# Altium PCB Switch.PcbDoc (part 2 of 2)
Units mm, origin at the board's own origin, x right, y up, seen from the top; angles counter-clockwise.
Board outline 170 x 46 mm, 4 copper layers (SIG, GND1, GND2, PWR/SIG), stack 1.564 mm thick; 45 components, 96 nets, 349 pads, 136 vias.
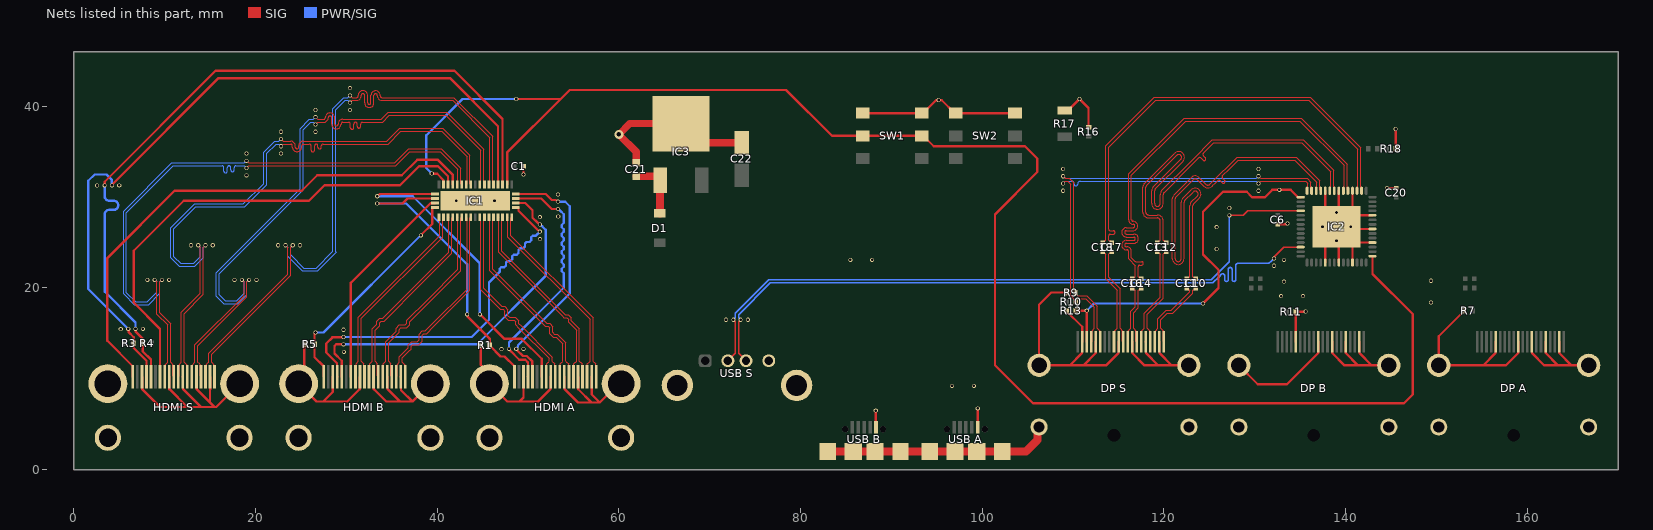
[diagram p4: the nets of this part, all layers, seen from the top]

## Via types
v1: diameter 0.45, hole 0.3, SIG to PWR/SIG, 134 vias
v2: diameter 1, hole 0.5, SIG to PWR/SIG, 2 vias

## Nets (pads, with @x,y where several pads share a name; then routed paths per layer and width w, separated by ;. In a path a pad name is that pad's centre, name@x,y a point inside that pad or via, vN(x,y) a via of type N, cw(c..) or ccw(c..) an arc to the next point about the centre after c; other vN are vias at no path point) (continued)
DP_Sink_AUX_N: "DP S.17" IC2.14 R10.1 | length 49.6
  SIG w0.122: v1(108.9,31.5) 109.138,31.738 109.426,31.738 109.736,31.428 109.736,19.191 110.086,18.841 110.086,18.689 R10.1@110.275,18.5 110.464,18.689 110.464,18.766 110.535,18.838 111.362,18.838 112.338,17.862 112.338,15.556 112.079,15.297 112.079,14.159 112,14.08 ; v1(130.4,31.5) 130.638,31.738 135.611,31.738 135.838,31.511 135.838,30.788 IC2.14@135.75,30.7
  PWR/SIG w0.122: v1(108.9,31.5) 109.138,31.738 109.862,31.738 cw(c109.862,31.5) 110.1,31.5 110.1,31.438 ccw(c110.3,31.438) 110.5,31.438 cw(c110.8,31.438) 110.8,31.738 130.162,31.738 v1(130.4,31.5)
DP_Sink_AUX_P: "DP S.15" IC2.13 R9.1 | length 49.4
  SIG w0.122: v1(108.9,32.3) 109.138,32.062 109.56,32.062 110.061,31.562 110.061,19.81 110.086,19.785 110.086,19.689 R9.1@110.275,19.5 110.464,19.311 110.464,19.234 110.535,19.162 111.497,19.162 112.662,17.997 112.662,15.556 112.921,15.297 112.921,14.159 113,14.08 ; v1(130.4,32.3) 130.638,32.062 135.745,32.062 136.162,31.645 136.162,30.788 IC2.13@136.25,30.7
  PWR/SIG w0.122: v1(108.9,32.3) 109.138,32.062 130.162,32.062 v1(130.4,32.3)
DP_Sink_D0_AC_N: "DP S.10" C17.2 | length 10.8
  SIG w0.122: C17.2@114.25,24 114.061,23.811 113.984,23.811 113.913,23.74 113.913,21.157 115.162,19.907 115.162,15.556 115.421,15.297 115.421,14.159 115.5,14.08
DP_Sink_D0_AC_P: "DP S.12" C18.2 | length 10.8
  SIG w0.122: C18.2@113.25,24 113.439,23.811 113.516,23.811 113.588,23.739 113.588,21.307 113.58,21.299 113.58,21.03 114.838,19.772 114.838,15.556 114.579,15.297 114.579,14.159 114.5,14.08
DP_Sink_D0_N: C17.1 IC2.3 | length 48.2
  SIG w0.122: C17.1@114.25,25 114.061,25.189 113.984,25.189 113.913,25.26 113.913,25.3 113.913,25.737 cw(c114.1,25.737) 114.1,25.924 114.425,25.924 ccw(c114.425,26.112) 114.612,26.112 ccw(c114.425,26.112) 114.425,26.3 114.1,26.3 cw(c114.1,26.488) 113.913,26.488 113.913,27.6 113.913,35.513 119.075,40.675 135.94,40.675 141.338,35.278 141.338,30.788 IC2.3@141.25,30.7
DP_Sink_D0_P: C18.1 IC2.2 | length 48.2
  SIG w0.122: C18.1@113.25,25 113.439,25.189 113.516,25.189 113.588,25.26 113.588,35.647 118.941,41 136.075,41 141.662,35.413 141.662,30.788 IC2.2@141.75,30.7
DP_Sink_D1_AC_N: "DP S.7" C14.2 | length 6.5
  SIG w0.122: 117,14.08 116.921,14.159 116.921,15.297 116.662,15.556 116.662,17.3 117.162,17.8 117.162,19.74 117.234,19.811 117.311,19.811 C14.2@117.5,20
DP_Sink_D1_AC_P: "DP S.9" C16.2 | length 6.5
  SIG w0.122: 116,14.08 116.079,14.159 116.079,15.297 116.338,15.556 116.338,17.435 116.838,17.935 116.838,19.74 116.766,19.811 116.689,19.811 C16.2@116.5,20
DP_Sink_D1_N: C14.1 IC2.6 | length 48.2
  SIG w0.122: C14.1@117.5,21 117.311,21.189 117.234,21.189 117.162,21.26 117.162,21.9 117.162,22.337 cw(c117.35,22.337) 117.35,22.524 117.549,22.524 ccw(c117.549,22.712) 117.737,22.712 ccw(c117.549,22.712) 117.549,22.9 116.937,22.9 cw(c116.937,23.088) 116.804,22.955 116.425,23.335 116.425,23.8 116.425,24.023 ccw(c115.912,24.023) 115.912,24.536 115.851,24.536 cw(c115.851,24.724) 115.663,24.724 cw(c115.851,24.724) 115.851,24.912 116.674,24.912 ccw(c116.674,25.425) 117.187,25.425 ccw(c116.674,25.425) 116.674,25.937 115.855,25.937 cw(c115.855,26.125) 115.667,26.125 cw(c115.855,26.125) 115.855,26.313 116.613,26.313 ccw(c116.613,26.826) 117.126,26.826 ccw(c116.613,26.826) 116.613,27.338 cw(c116.613,27.526) 116.425,27.526 116.425,31 116.425,32.425 122.375,38.375 134.965,38.375 139.838,33.503 139.838,30.788 IC2.6@139.75,30.7
DP_Sink_D1_P: C16.1 IC2.5 | length 48.2
  SIG w0.122: C16.1@116.5,21 116.689,21.189 116.766,21.189 116.838,21.26 116.838,22.462 116.1,23.2 116.1,23.8 116.1,24.023 ccw(c115.912,24.023) 115.912,24.211 115.851,24.211 cw(c115.851,24.724) 115.338,24.724 cw(c115.851,24.724) 115.851,25.237 116.674,25.237 ccw(c116.674,25.425) 116.862,25.425 ccw(c116.674,25.425) 116.674,25.612 115.855,25.612 cw(c115.855,26.125) 115.342,26.125 cw(c115.855,26.125) 115.855,26.638 116.613,26.638 ccw(c116.613,26.826) 116.801,26.826 ccw(c116.613,26.826) 116.613,27.014 cw(c116.613,27.526) 116.1,27.526 116.1,31 116.1,32.559 122.241,38.7 135.1,38.7 140.162,33.638 140.162,30.788 IC2.5@140.25,30.7
DP_Sink_D2_AC_N: "DP S.4" C12.2 | length 11
  SIG w0.122: 118.5,14.08 118.421,14.159 118.421,15.297 118.162,15.556 118.162,17.103 119.912,18.853 119.912,23.74 119.984,23.811 120.061,23.811 C12.2@120.25,24
DP_Sink_D2_AC_P: "DP S.6" C13.2 | length 11
  SIG w0.122: 117.5,14.08 117.579,14.159 117.579,15.297 117.838,15.556 117.838,17.238 119.588,18.988 119.588,23.74 119.516,23.811 119.439,23.811 C13.2@119.25,24
DP_Sink_D2_N: C12.1 IC2.9 | length 48.2
  SIG w0.122: C12.1@120.25,25 120.061,25.189 119.984,25.189 119.912,25.26 119.912,27.171 119.912,27.394 ccw(c119.273,27.394) 119.273,28.034 118.318,28.034 cw(c118.318,28.349) 118.003,28.349 118.003,31.073 cw(c118.318,31.073) 118.095,31.295 121.401,34.601 cw(c121.624,34.379) 121.846,34.156 118.82,31.129 ccw(c119.273,30.677) 118.633,30.677 118.633,29.303 ccw(c119.273,29.303) 119.273,28.663 ccw(c119.273,29.303) 119.912,29.303 119.912,30.282 cw(c120.227,30.282) 120.004,30.504 123.34,33.84 123.45,33.95 123.5,34 123.809,34.309 cw(c123.942,34.176) 124.074,34.309 124.301,34.082 ccw(c124.434,34.215) 124.567,34.082 ccw(c124.434,34.215) 124.567,34.348 124.34,34.574 cw(c124.473,34.707) 124.34,34.84 125.1,35.6 125.475,35.975 135.175,35.975 138.338,32.812 138.338,30.788 IC2.9@138.25,30.7
DP_Sink_D2_P: C13.1 IC2.8 | length 48.2
  SIG w0.122: C13.1@119.25,25 119.439,25.189 119.516,25.189 119.588,25.26 119.588,27.171 119.588,27.394 ccw(c119.273,27.394) 119.273,27.709 118.318,27.709 cw(c118.318,28.349) 117.678,28.349 117.678,31.073 cw(c118.318,31.073) 117.865,31.524 121.171,34.831 cw(c121.624,34.379) 122.124,33.979 122.124,33.974 119.05,30.9 ccw(c119.273,30.677) 118.958,30.677 118.958,29.303 ccw(c119.273,29.303) 119.273,28.988 ccw(c119.273,29.303) 119.588,29.303 119.588,30.282 cw(c120.227,30.282) 119.774,30.734 122.82,33.779 123.22,34.18 125.341,36.3 135.309,36.3 138.662,32.947 138.662,30.788 IC2.8@138.75,30.7
DP_Sink_D3_AC_N: "DP S.1" C10.2 | length 8
  SIG w0.122: 120,14.08 119.921,14.159 119.921,15.297 119.662,15.556 119.662,16.5 120.387,17.225 120.943,17.225 123.162,19.445 123.162,19.74 123.234,19.811 123.311,19.811 C10.2@123.5,20
DP_Sink_D3_AC_P: "DP S.3" C11.2 | length 8
  SIG w0.122: 119,14.08 119.079,14.159 119.079,15.297 119.338,15.556 119.338,16.635 120.253,17.55 120.808,17.55 122.838,19.579 122.838,19.74 122.766,19.811 122.689,19.811 C11.2@122.5,20
DP_Sink_D3_N: C10.1 IC2.12 | length 48.2
  SIG w0.122: C10.1@123.5,21 123.311,21.189 123.234,21.189 123.162,21.26 123.162,21.771 123.162,29.027 cw(c123.477,29.027) 123.254,29.249 123.894,29.889 ; 123.895,29.89 ccw(c123.442,30.342) 123.895,30.794 ccw(c123.442,30.342) 122.99,30.794 122.07,29.874 ccw(c122.523,29.423) 121.883,29.423 121.883,23.22 cw(c121.568,23.22) 121.568,22.905 cw(c121.568,23.22) 121.253,23.22 121.253,29.818 cw(c121.568,29.818) 121.345,30.04 123.22,31.915 cw(c123.442,31.692) 123.665,31.915 124.387,31.192 ccw(c124.84,31.644) 125.292,31.192 125.45,31.35 125.6,31.5 125.909,31.809 cw(c126.042,31.676) 126.174,31.809 126.401,31.582 ccw(c126.534,31.715) 126.667,31.582 ccw(c126.534,31.715) 126.667,31.848 126.44,32.074 cw(c126.573,32.207) 126.44,32.34 127.25,33.15 128.175,34.075 134.418,34.075 136.838,31.655 136.838,30.788 IC2.12@136.75,30.7
DP_Sink_D3_P: C11.1 IC2.11 | length 48.3
  SIG w0.122: C11.1@122.5,21 122.689,21.189 122.766,21.189 122.838,21.26 122.838,21.771 122.838,29.027 cw(c123.477,29.027) 123.024,29.479 123.666,30.12 ccw(c123.442,30.342) 123.665,30.565 ccw(c123.442,30.342) 123.22,30.565 122.3,29.645 ccw(c122.523,29.423) 122.208,29.423 122.208,23.22 cw(c121.568,23.22) 121.568,22.581 cw(c121.568,23.22) 120.928,23.22 120.928,29.818 cw(c121.568,29.818) 121.115,30.27 122.991,32.145 cw(c123.442,31.692) 123.895,32.144 124.617,31.422 ccw(c124.84,31.644) 125.063,31.422 125.22,31.58 128.041,34.4 134.552,34.4 137.162,31.79 137.162,30.788 IC2.11@137.25,30.7 IC2.11@137.31,30.64
DP_Sink_HPD: "DP S.18" IC2.15 R13.2 | length 41.9
  SIG w0.254: R13.2@110.275,17.5 110.275,17.45 110.325,17.5 v1(111.5,17.5) 111.5,14.08 ; v1(124.3,18.3) 126,20 126,22 124.3,23.7 124.3,28.4 126.5,30.6 129.1,30.6 129.7,30 131.123,30 131.923,30.8 v1(132.7,30.8) 133.95,30.8 134.75,30 IC2.15@135.05,30
  PWR/SIG w0.254: v1(111.5,17.5) 112.3,18.3 v1(124.3,18.3)
ENABLE: IC1.2 IC1.16 IC2.43 SW1.2 SW1.5 | length 180.7
  SIG w0.254: v1(39.4,32.6) 39.438,32.562 40.004,32.562 40.677,31.89 40.677,31.423 IC1.16@40.7,31.4 ; IC1.2@47.7,31.4 47.7,34.9 53.6,40.8 ; v1(48.7,40.8) 53.6,40.8 ; IC2.43@142.95,23.5 142.95,21.55 147.4,17.1 147.4,8.3 146.4,7.3 105.6,7.3 101.4,11.5 101.4,28.1 106.058,32.758 106.058,34.242 104.7,35.6 94.65,35.6 93.5,36.75 SW1.5@93.35,36.75 SW1.2@86.85,36.75 83.45,36.75 78.4,41.8 54.6,41.8 53.6,40.8
  PWR/SIG w0.254: v1(39.4,32.6) 38.8,33.2 38.8,36.8 42.8,40.8 v1(48.7,40.8)
GND: "DP A.2" "DP A.5" "DP A.8" "DP A.11" "DP A.16" "DP A.MH1" "DP A.MH2" "DP A.MH3" "DP A.MH4" "DP B.2" "DP B.5" "DP B.8" "DP B.11" "DP B.16" "DP B.MH1" "DP B.MH2" "DP B.MH3" "DP B.MH4" "DP S.2" "DP S.5" "DP S.8" "DP S.11" "DP S.16" "DP S.19" "DP S.MH1" "DP S.MH2" "DP S.MH3" "DP S.MH4" "HDMI A.2" "HDMI A.5" "HDMI A.8" "HDMI A.11" "HDMI A.17" "HDMI A.MH1" "HDMI A.MH2" "HDMI A.MH3" "HDMI A.MH4" "HDMI B.2" "HDMI B.5" "HDMI B.8" "HDMI B.11" "HDMI B.17" "HDMI B.MH1" "HDMI B.MH2" "HDMI B.MH3" "HDMI B.MH4" "HDMI S.2" "HDMI S.5" "HDMI S.8" "HDMI S.11" "HDMI S.17" "HDMI S.MH1" "HDMI S.MH2" "HDMI S.MH3" "HDMI S.MH4" "USB A.5" "USB A.Shell" "USB B.5" "USB B.Shell" "USB S.4" "USB S.Shell" C1.2 C6.2 C20.1 C21.2 C22.2 IC1.43 IC2.4 IC2.7 IC2.10 IC2.33 IC2.36 IC2.39 IC2.46 IC2.49 IC2.52 IC2.57 IC3.3 R1.1 R5.1 R7.1 R9.2 R11.1 R13.1 R16.1 R17.1 R18.1 SW1.3 SW1.6 SW2.3 SW2.6 | length 319.1
  SIG w0.254: 7.5,10.235 7.523,10.212 7.523,8.87 9.493,6.9 12.493,6.9 ; 10.5,10.235 10.523,10.212 10.523,8.87 12.493,6.9 ; 12,10.235 12.023,10.212 12.023,8.87 13.993,6.9 ; 13.5,10.235 13.523,10.212 13.523,8.87 15,7.393 ; 15.023,8.87 15.023,10.212 15,10.235 15,7.393 ; 18.25,9.475 15.675,6.9 15.493,6.9 ; R5.1@25.5,13.8 25.377,13.677 25.377,10.102 24.75,9.475 26.725,7.5 27.451,7.5 ; 28.5,10.235 28.5,8.549 27.451,7.5 ; 31.5,10.235 31.477,10.212 31.477,8.87 30.107,7.5 27.451,7.5 ; 33,10.235 33.023,10.212 33.023,8.87 34.393,7.5 35.893,7.5 ; 34.5,10.235 34.523,10.212 34.523,8.87 35.893,7.5 ; 36,10.235 36.023,10.212 36.023,8.752 37.275,7.5 ; 39.25,9.475 37.275,7.5 ; R1.1@44.8,13.7 44.8,11.513 45.75,10.563 45.75,9.475 47.725,7.5 49.051,7.5 ; 49.5,10.235 49.5,7.949 49.051,7.5 ; v1(49.5,32.5) C1.2@49.5,33.4 ; 52.5,10.235 52.477,10.212 52.477,8.87 51.107,7.5 49.051,7.5 ; 54,10.235 54.023,10.212 54.023,8.87 55.488,7.405 56.976,7.405 ; 55.5,10.235 55.523,10.212 55.523,8.859 56.976,7.405 ; 57,10.235 57,8.31 57.905,7.405 ; 60.25,9.475 59.975,9.475 57.905,7.405 ; SW1.3@86.85,39.25 SW1.6@93.35,39.25 93.5,39.25 94.912,40.662 95.162,40.662 v1(95.2,40.7) 95.238,40.662 95.538,40.662 96.95,39.25 SW2.3@97.1,39.25 SW2.6@103.6,39.25 ; v1@88.25,6.5 88.275,6.475 88.275,4.7 88.3,4.675 ; 99.5,4.675 v1(99.5,6.75) ; R17.1@109.1,39.55 109.45,39.55 v1(110.7,40.8) 111.7,39.8 R16.1@111.7,37.7 ; R13.1@109.275,17.5 109.275,17.45 111,15.725 111,14.08 110.987,14.067 110.987,12.835 109.632,11.48 ; R9.2@109.275,19.5 107.6,19.5 106.25,18.15 106.25,11.48 109.632,11.48 ; 112.5,14.08 112.487,14.067 112.487,12.835 111.132,11.48 ; 115,14.08 114.987,14.067 114.987,12.835 113.632,11.48 111.132,11.48 ; 116.5,14.08 116.513,14.067 116.513,12.835 117.868,11.48 119.368,11.48 ; 118,14.08 118.013,14.067 118.013,12.835 119.368,11.48 ; 119.5,14.08 119.513,14.067 119.513,12.835 120.868,11.48 ; 122.75,11.48 120.868,11.48 ; 128.25,11.48 130.33,9.4 133.552,9.4 136.987,12.835 136.987,14.067 137,14.08 ; C6.2@132.5,27 133.447,27 133.547,27.1 v1(133.6,27.1) ; 134.5,14.08 R11.1@134.5,17.4 v1(135.6,17.4) ; IC2.33@137.75,22.8 137.75,25.5 IC2.57@139,26.75 ; IC2.10@137.75,30.7 137.75,28 IC2.57@139,26.75 ; 138.5,14.08 138.513,14.067 138.513,12.835 139.868,11.48 141.368,11.48 ; IC2.36@139.25,22.8 IC2.57@139.25,26.5 ; IC2.7@139.25,30.7 IC2.57@139.25,27 ; 140,14.08 140.013,14.067 140.013,12.835 141.368,11.48 ; IC2.39@140.75,22.8 IC2.57@140.75,25 ; IC2.4@140.75,30.7 140.75,28.5 IC2.57@140.25,28 ; 141.5,14.08 141.513,14.067 141.513,12.835 142.868,11.48 ; IC2.46@142.95,25 IC2.57@140.75,25 ; IC2.49@142.95,26.5 IC2.57@139.25,26.5 ; IC2.52@142.95,28 IC2.57@140.25,28 ; v1(144.55,31) C20.1@145.55,31 ; 144.75,11.48 142.868,11.48 ; R18.1@145.5,35.35 v1(145.5,37.5) ; R7.1@153,17.5 153,17.45 150.25,14.7 150.25,11.48 155.132,11.48 ; 156.5,14.08 156.487,14.067 156.487,12.835 155.132,11.48 ; 159,14.08 158.987,14.067 158.987,12.835 157.632,11.48 155.132,11.48 ; 160.5,14.08 160.513,14.067 160.513,12.835 161.868,11.48 163.368,11.48 ; 162,14.08 162.013,14.067 162.013,12.835 163.368,11.48 ; 163.5,14.08 163.513,14.067 163.513,12.835 164.868,11.48 ; 166.75,11.48 164.868,11.48 ; 12.493,6.9 13.993,6.9 ; 13.993,6.9 15.493,6.9 ; 15,7.393 15.493,6.9 ; 35.893,7.5 37.275,7.5 ; 56.976,7.405 57.905,7.405 ; 109.632,11.48 111.132,11.48 ; 119.368,11.48 120.868,11.48 ; IC2.57@139,26.75 IC2.57@139.25,27 ; IC2.57@139,26.75 IC2.57@139.25,26.5 ; IC2.57@139.25,26.5 IC2.57@140.75,25 ; IC2.57@139.25,27 IC2.57@140.25,28 ; 141.368,11.48 142.868,11.48 ; 163.368,11.48 164.868,11.48
  SIG w0.8: C21.2@61.9,33.8 61.9,35 v2(60,36.9) 60.004,36.9 61.204,38.1 IC3.3@66.85,38.1 68.95,36 C22.2@73.5,36
  SIG w0.9: 83,2 85.8,2 88.2,2 91,2 94.2,2 97,2 99.4,2 102.2,2 104.8,2 106.063,3.263 106.063,4.513 106.25,4.7
  other v1: 88.275,6.5 96.675,9.232 99.075,9.232 29.729,12.971 47.071,13.271 49.5,13.3 29.7,15.4 5.171,15.471 7.6,15.5 71.8,16.5 74.2,16.5 149.4,18.4 132.9,19.1 135.3,19.1 133.2,20.7 149.4,20.8 8.1,20.9 10.5,20.9 17.7,20.9 20.1,20.9 132.1,22.45 85.475,23.1 87.875,23.1 133.2,23.1 125.8,24.3 12.9,24.7 15.3,24.7 22.5,24.7 24.9,24.7 139,25.2 51.329,25.371 125.8,26.7 137.45,26.75 140.55,26.75 51.3,27.8 53.329,27.871 139,28.3 127.2,28.8 42.1,29.6 46.3,29.6 53.3,30.3 108.9,30.7 130.4,30.7 2.571,31.271 5,31.3 19,32.4 108.9,33.1 130.4,33.1 19,34.8 22.8,34.8 22.8,37.2 26.6,37.2 26.6,39.6 30.4,39.6 30.4,42
HDMI_A_CEC: "HDMI A.13" IC1.18 | length 37.2
  SIG w0.254: v1(33.4,30.1) 33.453,30.1 33.703,30.35 IC1.18@39.75,30.35 ; v1(44.7,17.1) 47.4,14.4 49.3,14.4 51.5,12.2 51.5,10.235 51.477,10.258
  PWR/SIG w0.254: v1(33.4,30.1) 37.3,30.1 44.7,22.7 v1(44.7,17.1)
HDMI_A_D0_N: "HDMI A.3" IC1.37 | length 21.5
  SIG w0.122: IC1.37@47.7,27.8 47.788,27.712 47.788,25.612 56.838,16.562 56.838,11.921 56.766,11.85 56.72,11.85 56.535,11.665 56.535,10.27 56.5,10.235
HDMI_A_D0_P: "HDMI A.1" IC1.38 | length 21.5
  SIG w0.122: IC1.38@48.2,27.8 48.112,27.712 48.112,25.747 57.162,16.697 57.162,11.921 57.234,11.85 57.28,11.85 57.465,11.665 57.465,10.27 57.5,10.235
HDMI_A_D1_N: "HDMI A.6" IC1.35 | length 21.5
  SIG w0.122: IC1.35@46.7,27.8 46.788,27.712 46.788,23.912 53.75,16.95 53.955,16.745 54.279,16.745 54.459,16.565 54.459,16.241 54.85,15.85 55.338,15.362 55.338,13.662 55.338,11.921 55.266,11.85 55.22,11.85 55.035,11.665 55.035,10.27 55,10.235
HDMI_A_D1_P: "HDMI A.4" IC1.36 | length 21.5
  SIG w0.122: IC1.36@47.2,27.8 47.112,27.712 47.112,24.047 53.98,17.18 54.09,17.069 54.414,17.069 54.784,16.699 54.784,16.376 55.08,16.08 55.662,15.497 55.662,13.797 55.662,11.921 55.734,11.85 55.78,11.85 55.965,11.665 55.965,10.27 56,10.235
HDMI_A_D2_N: "HDMI A.9" IC1.33 | length 21.5
  SIG w0.122: IC1.33@45.7,27.8 45.788,27.712 45.788,21.912 51.7,16 51.905,15.795 52.229,15.795 52.409,15.615 52.409,14.967 52.779,14.597 53.103,14.597 53.45,14.25 53.838,13.862 53.838,12.812 53.838,11.921 53.766,11.85 53.72,11.85 53.535,11.665 53.535,10.27 53.5,10.235
HDMI_A_D2_P: "HDMI A.7" IC1.34 | length 21.5
  SIG w0.122: IC1.34@46.2,27.8 46.112,27.712 46.112,22.047 51.93,16.23 52.04,16.119 52.364,16.119 52.734,15.749 52.734,15.102 52.913,14.922 53.237,14.922 53.68,14.48 54.162,13.997 54.162,12.947 54.162,11.921 54.234,11.85 54.28,11.85 54.465,11.665 54.465,10.27 54.5,10.235
HDMI_A_D3_N: "HDMI A.12" IC1.31 | length 21.5
  SIG w0.122: IC1.31@44.7,27.8 44.788,27.712 44.788,19.812 46.75,17.85 46.955,17.645 47.279,17.645 47.459,17.465 47.459,16.817 47.829,16.447 48.477,16.447 48.656,16.268 48.656,15.944 48.95,15.65 52.338,12.262 52.338,11.921 52.266,11.85 52.22,11.85 52.035,11.665 52.035,10.27 52,10.235
HDMI_A_D3_P: "HDMI A.10" IC1.32 | length 21.5
  SIG w0.122: IC1.32@45.2,27.8 45.112,27.712 45.112,19.947 46.98,18.08 47.09,17.969 47.414,17.969 47.784,17.599 47.784,16.952 47.963,16.772 48.611,16.772 48.981,16.402 48.981,16.078 49.18,15.88 52.662,12.397 52.662,11.921 52.734,11.85 52.78,11.85 52.965,11.665 52.965,10.27 53,10.235
HDMI_A_HPD: "HDMI A.19" IC1.19 R1.2 | length 34
  SIG w0.254: v1(33.4,29.3) 36.178,29.3 36.728,29.85 IC1.19@39.75,29.85 ; v1(43.3,17.1) 43.338,17.062 43.338,16.862 45.8,14.4 R1.2@45.8,13.7 45.8,13.65 46.982,12.468 47.417,12.468 48.5,11.385 48.5,10.235
  PWR/SIG w0.254: v1(33.4,29.3) 36.6,29.3 43.3,22.6 v1(43.3,17.1)
HDMI_A_SCL: "HDMI A.15" IC1.42 | length 28.7
  SIG w0.254: IC1.42@48.65,30.35 51.95,30.35 52.606,29.694 53.053,29.694 53.247,29.5 v1(53.3,29.5) ; v1(48.7,13.3) 48.738,13.262 48.738,13.205 49.439,12.504 49.867,12.504 50.477,11.894 50.477,10.258 50.5,10.235
  PWR/SIG w0.254: v1(48.7,13.3) 48.7,13.353 48.894,13.547 48.894,13.694 54.6,19.4 54.6,29 54.1,29.5 v1(53.3,29.5)
HDMI_A_SDA: "HDMI A.16" IC1.41 | length 28.8
  SIG w0.254: v1(47.9,13.3) 47.9,13.247 48.094,13.053 48.094,13.049 49.043,12.1 49.7,12.1 50,11.8 50,10.235 49.977,10.258 ; IC1.41@48.65,29.85 51.45,29.85 52.6,28.7 v1(53.3,28.7)
  PWR/SIG w0.254: v1(47.9,13.3) 47.9,14 53.935,20.035 53.935,21.5 53.935,21.627 53.706,21.856 53.706,22.11 53.935,22.339 53.935,22.593 53.706,22.822 53.706,23.076 53.935,23.305 53.935,23.559 53.706,23.788 53.706,24.042 53.935,24.271 53.935,24.525 53.706,24.754 53.706,25.008 53.935,25.237 53.935,25.491 53.706,25.72 53.706,25.974 53.935,26.203 53.935,26.457 53.706,26.686 53.706,26.94 53.935,27.169 53.935,27.4 53.935,28.123 53.58,28.477 53.576,28.477 53.353,28.7 v1(53.3,28.7)
HDMI_B_CEC: "HDMI B.13" IC1.20 | length 23.2
  SIG w0.254: 30.5,10.235 30.5,20.567 39.26,29.327 39.727,29.327 IC1.20@39.75,29.35
HDMI_B_D0_N: "HDMI B.3" IC1.28 | length 21.4
  SIG w0.122: 35.5,10.235 35.589,10.324 35.589,11.572 35.838,11.821 35.838,12.438 36.7,13.3 36.81,13.41 36.81,13.734 37.18,14.104 37.828,14.104 38.008,14.284 38.008,14.931 38.377,15.301 38.701,15.301 39.4,16 43.288,19.888 43.288,27.712 IC1.28@43.2,27.8
HDMI_B_D0_P: "HDMI B.1" IC1.29 | length 21.4
  SIG w0.122: 36.5,10.235 36.411,10.324 36.411,11.572 36.162,11.821 36.162,12.303 36.93,13.07 37.135,13.276 37.135,13.6 37.315,13.779 37.963,13.779 38.332,14.149 38.332,14.797 38.512,14.976 38.836,14.976 39.63,15.77 43.612,19.753 43.612,27.712 IC1.29@43.7,27.8
HDMI_B_D1_N: "HDMI B.6" IC1.26 | length 21.4
  SIG w0.122: 34,10.235 34.089,10.324 34.089,11.673 34.338,11.921 34.338,12.862 34.338,14.097 35.37,15.13 35.481,15.24 35.481,15.564 35.851,15.934 36.498,15.934 36.678,16.113 36.678,16.437 38.97,18.73 42.288,22.047 42.288,27.712 IC1.26@42.2,27.8
HDMI_B_D1_P: "HDMI B.4" IC1.27 | length 21.4
  SIG w0.122: 35,10.235 34.911,10.324 34.911,11.673 34.662,11.921 34.662,12.997 34.662,13.962 35.6,14.9 35.805,15.105 35.805,15.429 35.985,15.609 36.633,15.609 37.003,15.979 37.003,16.303 39.2,18.5 42.612,21.912 42.612,27.712 IC1.27@42.7,27.8
HDMI_B_D2_N: "HDMI B.9" IC1.24 | length 21.4
  SIG w0.122: 32.5,10.235 32.589,10.324 32.589,11.673 32.838,11.921 32.838,15.497 33.22,15.88 33.331,15.99 33.331,16.314 33.701,16.684 34.024,16.684 38.07,20.73 41.288,23.947 41.288,27.712 IC1.24@41.2,27.8
HDMI_B_D2_P: "HDMI B.7" IC1.25 | length 21.4
  SIG w0.122: 33.5,10.235 33.411,10.324 33.411,11.673 33.162,11.921 33.162,15.362 33.45,15.65 33.655,15.855 33.655,16.179 33.835,16.359 34.159,16.359 38.3,20.5 41.612,23.812 41.612,27.712 IC1.25@41.7,27.8
HDMI_B_D3_N: "HDMI B.12" IC1.22 | length 21.4
  SIG w0.122: 31,10.235 31.089,10.324 31.089,11.673 31.338,11.921 31.338,14.053 31.338,16.797 40.288,25.747 40.288,27.712 IC1.22@40.2,27.8
HDMI_B_D3_P: "HDMI B.10" IC1.23 | length 21.4
  SIG w0.122: 32,10.235 31.911,10.324 31.911,11.673 31.662,11.921 31.662,14.187 31.662,16.662 40.612,25.612 40.612,27.712 IC1.23@40.7,27.8
HDMI_B_HPD: "HDMI B.19" IC1.21 R5.2 | length 25.2
  SIG w0.254: v1(26.6,15.1) 26.6,15.047 26.5,14.947 R5.2@26.5,13.8 26.5,12.385 27.477,11.408 27.477,10.258 ; v1(38.2,25.8) 39.452,27.052 39.452,28.827 39.475,28.85 IC1.21@39.75,28.85
  PWR/SIG w0.254: v1(26.6,15.1) 27.5,15.1 v1(38.2,25.8)
HDMI_B_SCL: "HDMI B.15" IC1.40 | length 40
  SIG w0.254: 29.5,10.235 29.5,12 28.7,12.8 28.7,13.6 28.9,13.8 v1@29.5,13.8 ; IC1.40@48.65,29.35 49.701,29.35 50.5,28.551 50.5,27.743 51.049,27.194 51.053,27.194 51.247,27 v1(51.3,27)
  PWR/SIG w0.254: v1(29.7,13.8) 44.4,13.8 51.935,21.335 51.935,26.423 51.551,26.806 51.547,26.806 51.353,27 v1(51.3,27)
HDMI_B_SDA: "HDMI B.16" IC1.39 | length 40.2
  SIG w0.254: 29,10.235 28.977,10.258 28.977,11.723 27.8,12.9 27.8,13.9 28.462,14.562 29.662,14.562 v1(29.7,14.6) ; IC1.39@48.65,28.85 48.925,28.85 48.948,28.827 48.948,28.495 49.998,27.444 51.205,26.238 51.262,26.238 v1(51.3,26.2)
  PWR/SIG w0.254: v1(29.7,14.6) 43.8,14.6 45.7,16.5 45.7,20.6 46.8,21.7 46.89,21.79 46.89,22.114 47.069,22.293 47.393,22.293 47.573,22.473 47.573,22.797 47.752,22.976 48.076,22.976 48.256,23.156 48.256,23.48 48.436,23.659 48.759,23.659 48.957,23.857 48.957,24.181 49.137,24.36 49.46,24.36 49.658,24.558 49.658,24.882 49.838,25.061 50.161,25.061 50.359,25.259 50.359,25.583 50.539,25.762 50.862,25.762 51,25.9 v1(51.3,26.2)
HDMI_Sink_CEC: "HDMI S.13" IC1.15 | length 54.9
  SIG w0.254: 9.5,10.235 9.5,15.5 6.6,18.4 6.6,24.1 12.1,29.6 25.9,29.6 27.6,31.3 35.9,31.3 38,33.4 40.1,33.4 41.2,32.3 IC1.15@41.2,31.4
HDMI_Sink_D0_N: "HDMI S.3" IC1.6 | length 70
  SIG w0.122: 14.5,10.235 14.589,10.324 14.589,11.572 14.763,11.746 14.766,11.746 14.838,11.817 14.838,12.835 23.538,21.535 23.538,24.462 v1(23.3,24.7) ; v1(30.4,40.4) 30.638,40.638 30.9,40.638 31.123,40.638 ccw(c31.123,41.15) 31.636,41.15 31.636,41.212 cw(c31.824,41.212) 31.824,41.4 cw(c31.824,41.212) 32.012,41.212 32.012,40.388 ccw(c32.524,40.388) 32.524,39.876 ccw(c32.525,40.388) 33.037,40.388 33.037,41.19 cw(c33.225,41.19) 33.225,41.378 cw(c33.225,41.19) 33.413,41.19 33.413,41.15 ccw(c33.926,41.15) 33.926,40.638 34.55,40.638 41.703,40.638 45.788,36.553 45.788,31.488 IC1.6@45.7,31.4
  PWR/SIG w0.122: v1(23.3,24.7) 23.538,24.462 23.538,23.503 25.165,21.875 26.835,21.875 28.9,23.941 28.852,23.988 28.852,39.616 29.874,40.638 30.162,40.638 v1(30.4,40.4)
HDMI_Sink_D0_P: "HDMI S.1" IC1.5 | length 69.9
  SIG w0.122: 15.5,10.235 15.411,10.324 15.411,11.572 15.237,11.746 15.234,11.746 15.162,11.817 15.162,12.7 23.862,21.4 23.862,24.462 v1(24.1,24.7) ; v1(30.4,41.2) 30.638,40.962 30.9,40.962 31.123,40.962 ccw(c31.123,41.15) 31.311,41.15 31.311,41.212 cw(c31.824,41.212) 31.824,41.724 cw(c31.824,41.212) 32.337,41.212 32.337,40.388 ccw(c32.524,40.388) 32.524,40.2 ccw(c32.525,40.388) 32.712,40.388 32.712,41.19 cw(c33.225,41.19) 33.225,41.703 cw(c33.225,41.19) 33.738,41.19 33.738,41.15 ccw(c33.926,41.15) 33.926,40.962 34.55,40.962 35,40.962 39.369,40.962 41.838,40.962 46.112,36.688 46.112,31.488 IC1.5@46.2,31.4
  PWR/SIG w0.122: v1(24.1,24.7) 23.862,24.462 23.862,23.638 25.3,22.2 26.7,22.2 28.528,24.028 28.528,39.75 29.74,40.962 30.162,40.962 v1(30.4,41.2)
HDMI_Sink_D1_N: "HDMI S.6" IC1.8 | length 70
  SIG w0.122: 13,10.235 13.089,10.324 13.089,11.572 13.263,11.746 13.266,11.746 13.338,11.817 13.338,12.21 13.338,13.772 18.738,19.172 18.738,20.662 v1(18.5,20.9) ; v1(26.6,38) 26.838,38.238 26.921,38.238 27.5,38.238 ccw(c27.5,38.75) 28.013,38.75 cw(c28.201,38.75) 28.201,38.938 cw(c28.201,38.75) 28.388,38.75 28.388,38.024 ccw(c28.901,38.024) 28.901,37.512 ccw(c28.901,38.024) 29.414,38.024 29.414,38.05 cw(c29.602,38.05) 29.602,38.238 29.825,38.238 30.262,38.238 cw(c30.262,38.05) 30.45,38.05 30.45,37.663 ccw(c30.637,37.663) 30.637,37.476 ccw(c30.637,37.663) 30.825,37.663 30.825,38.05 cw(c31.013,38.05) 31.013,38.238 cw(c31.013,38.05) 31.201,38.05 31.201,37.788 ccw(c31.389,37.788) 31.389,37.6 ccw(c31.389,37.788) 31.577,37.788 31.577,38.05 cw(c31.764,38.05) 31.764,38.238 32.4,38.238 33.988,38.238 34.75,39 40.941,39 44.788,35.153 44.788,31.488 IC1.8@44.7,31.4
  PWR/SIG w0.122: v1(18.5,20.9) 18.738,20.662 18.738,19.397 17.941,18.6 16.65,18.6 16,19.25 16,21.541 25.25,30.791 25.25,37.413 26.074,38.238 26.362,38.238 v1(26.6,38)
HDMI_Sink_D1_P: "HDMI S.4" IC1.7 | length 70
  SIG w0.122: 14,10.235 13.911,10.324 13.911,11.572 13.737,11.746 13.734,11.746 13.662,11.817 13.662,12.345 13.662,13.638 19.062,19.038 19.062,20.662 v1(19.3,20.9) ; v1(26.6,38.8) 26.838,38.562 26.921,38.562 27.5,38.562 ccw(c27.5,38.75) 27.688,38.75 cw(c28.201,38.75) 28.201,39.263 cw(c28.201,38.75) 28.713,38.75 28.713,38.024 ccw(c28.901,38.024) 28.901,37.837 ccw(c28.901,38.024) 29.089,38.024 29.089,38.05 cw(c29.602,38.05) 29.602,38.562 29.825,38.562 33.853,38.562 34.615,39.325 41.075,39.325 45.112,35.288 45.112,31.488 IC1.7@45.2,31.4
  PWR/SIG w0.122: v1(19.3,20.9) 19.062,20.662 19.062,19.262 18.075,18.275 16.515,18.275 15.675,19.115 15.675,21.675 24.925,30.925 24.925,37.548 25.94,38.562 26.362,38.562 v1(26.6,38.8)
HDMI_Sink_D2_N: "HDMI S.9" IC1.11 | length 70
  SIG w0.122: 11.5,10.235 11.589,10.324 11.589,11.572 11.763,11.746 11.766,11.746 11.838,11.817 11.838,13.062 11.838,17.322 13.938,19.422 13.938,24.462 v1(13.7,24.7) ; v1(22.8,35.6) 23.038,35.838 23.286,35.838 23.875,35.838 cw(c23.875,35.65) 24.063,35.65 24.063,35.519 ccw(c24.576,35.519) 24.576,35.006 ccw(c24.576,35.519) 25.089,35.519 25.089,35.65 cw(c25.277,35.65) 25.277,35.838 25.5,35.838 25.937,35.838 cw(c25.937,35.65) 26.124,35.65 26.124,35.163 ccw(c26.312,35.163) 26.312,34.976 ccw(c26.312,35.163) 26.5,35.163 26.5,35.65 cw(c26.688,35.65) 26.688,35.838 cw(c26.688,35.65) 26.876,35.65 26.876,35.488 ccw(c27.064,35.488) 27.064,35.3 ccw(c27.064,35.488) 27.252,35.488 27.252,35.65 cw(c27.439,35.65) 27.439,35.838 28,35.838 34.588,35.838 36,37.25 40.491,37.25 43.288,34.453 43.288,31.488 IC1.11@43.2,31.4
  PWR/SIG w0.122: v1(13.7,24.7) 13.938,24.462 13.938,23.438 13.2,22.7 11.759,22.7 11,23.459 11,26.5 13.425,28.925 18.81,28.925 21.25,31.365 21.25,34.813 22.274,35.838 22.562,35.838 v1(22.8,35.6)
HDMI_Sink_D2_P: "HDMI S.7" IC1.10 | length 70
  SIG w0.122: 12.5,10.235 12.411,10.324 12.411,11.572 12.237,11.746 12.234,11.746 12.162,11.817 12.162,13.262 12.162,17.188 14.262,19.288 14.262,24.462 v1(14.5,24.7) ; v1(22.8,36.4) 23.038,36.162 23.286,36.162 23.875,36.162 cw(c23.875,35.65) 24.388,35.65 24.388,35.519 ccw(c24.576,35.519) 24.576,35.331 ccw(c24.576,35.519) 24.764,35.519 24.764,35.65 cw(c25.277,35.65) 25.277,36.162 25.5,36.162 34.453,36.162 35.865,37.575 40.625,37.575 43.612,34.588 43.612,31.488 IC1.10@43.7,31.4
  PWR/SIG w0.122: v1(14.5,24.7) 14.262,24.462 14.262,23.303 13.335,22.375 11.625,22.375 10.675,23.325 10.675,26.635 13.291,29.25 18.675,29.25 20.925,31.5 20.925,34.948 22.14,36.162 22.562,36.162 v1(22.8,36.4)
HDMI_Sink_D3_N: "HDMI S.12" IC1.13 | length 70
  SIG w0.122: v1(8.9,20.9) 9.138,20.662 9.138,17.128 10.338,15.928 10.338,12.01 10.338,11.817 10.266,11.746 10.263,11.746 10.089,11.572 10.089,10.324 10,10.235 ; v1(19,33.2) 19.238,33.438 35.438,33.438 37,35 40.341,35 42.288,33.053 42.288,31.488 IC1.13@42.2,31.4
  PWR/SIG w0.122: v1(8.9,20.9) 9.138,20.662 9.138,19.538 8.1,18.5 6.8,18.5 5.8,19.5 5.8,28.3 10.938,33.438 15.9,33.438 16.337,33.438 cw(c16.337,33.25) 16.524,33.25 16.524,32.863 ccw(c16.712,32.863) 16.712,32.676 ccw(c16.712,32.863) 16.9,32.863 16.9,33.25 cw(c17.088,33.25) 17.088,33.438 cw(c17.088,33.25) 17.276,33.25 17.276,32.988 ccw(c17.464,32.988) 17.464,32.8 ccw(c17.464,32.988) 17.652,32.988 17.652,33.25 cw(c17.839,33.25) 17.839,33.438 18.3,33.438 18.762,33.438 v1(19,33.2)
HDMI_Sink_D3_P: "HDMI S.10" IC1.12 | length 70
  SIG w0.122: v1(9.7,20.9) 9.462,20.662 9.462,17.262 10.662,16.062 10.662,12.145 10.662,11.817 10.734,11.746 10.737,11.746 10.911,11.572 10.911,10.324 11,10.235 ; v1(19,34) 19.238,33.762 35.303,33.762 36.865,35.325 40.475,35.325 42.612,33.188 42.612,31.488 IC1.12@42.7,31.4
  PWR/SIG w0.122: v1(9.7,20.9) 9.462,20.662 9.462,19.403 8.235,18.175 6.665,18.175 5.475,19.365 5.475,28.435 10.803,33.762 18.762,33.762 v1(19,34)
HDMI_Sink_HPD: "HDMI S.19" IC1.14 | length 58.5
  SIG w0.254: 6.5,10.235 6.5,11.385 3.7,14.185 3.7,23.3 11.1,30.7 25.1,30.7 26.8,32.4 36.1,32.4 37.8,34.1 40.1,34.1 41.7,32.5 IC1.14@41.7,31.4
HDMI_Sink_SCL: "HDMI S.15" IC1.3 R4.1 | length 84
  SIG w0.254: v1(3.4,31.3) 3.4,31.7 15.6,43.9 41.9,43.9 47.2,38.6 IC1.3@47.2,31.4 ; v1(6.8,15.5) 6.838,15.462 6.838,15.162 7,15 7.568,14.432 7.568,13.932 R4.1@7.6,13.9 ; R4.1@7.6,13.95 7.6,13.018 8.5,12.117 8.5,10.235
  PWR/SIG w0.254: v1(3.4,31.3) 3.4,30.1 ccw(c3.9,30.1) 3.9,29.6 4.4,29.6 cw(c4.4,29.1) 4.9,29.1 cw(c4.4,29.1) 4.4,28.6 3.9,28.6 ccw(c3.9,28.1) 3.4,28.1 3.4,19.6 6.8,16.2 v1(6.8,15.5)
HDMI_Sink_SDA: "HDMI S.16" IC1.4 R3.1 | length 84
  SIG w0.254: v1(4.2,31.3) 4.2,31.353 4.394,31.547 4.394,31.551 15.943,43.1 41.4,43.1 46.7,37.8 IC1.4@46.7,31.4 ; v1(6,15.5) 6.038,15.462 6.038,15.143 6.596,14.585 6.596,13.904 R3.1@6.6,13.9 6.6,13.4 8,12 8,10.235
  PWR/SIG w0.254: v1(4.2,31.3) 4.162,31.338 4.162,31.938 3.6,32.5 2.3,32.5 1.6,31.8 1.6,19.9 v1(6,15.5)
NetC21_1: C21.1 D1.1 IC3.1 | length 6.5
  SIG w0.8: C21.1@61.9,32.3 64.214,32.3 64.564,31.95 IC3.1@64.564,31.85
  SIG w0.9: D1.1@64.5,28.235 64.527,28.235 64.532,28.24 IC3.1@64.532,31.818
Sink_USB_N: "USB S.3" IC2.26 | length 75.2
  SIG w0.155: v1(73.4,16.5) 73.4,16.482 73.179,16.262 73.179,12.811 74,11.99 ; v1@132.1,23.4 133.2,24.5 IC2.26@135.05,24.5
  PWR/SIG w0.155: v1(73.4,16.5) 73.4,16.518 73.179,16.738 73.179,17.067 76.663,20.55 125.372,20.55 126.085,21.263 126.325,21.503 cw(c126.47,21.358) 126.674,21.358 126.674,20.917 ccw(c126.879,20.917) 126.879,20.712 ccw(c126.879,20.917) 127.084,20.917 127.084,22.057 cw(c127.288,22.057) 127.288,22.262 cw(c127.288,22.057) 127.493,22.057 127.493,20.917 ccw(c127.698,20.917) 127.698,20.712 ccw(c127.698,20.917) 127.903,20.917 127.903,22.495 cw(c128.107,22.495) 128.107,22.7 131.55,22.7 131.792,22.942 v1(132.1,23.25)
Sink_USB_P: "USB S.2" IC2.18 | length 75.6
  SIG w0.155: 72,11.99 72.821,12.811 72.821,16.262 72.6,16.482 v1(72.6,16.5) ; v1(127.2,28) 128.7,28 129.2,28.5 IC2.18@135.05,28.5
  PWR/SIG w0.155: v1(72.6,16.5) 72.6,16.518 72.821,16.738 72.821,17.215 76.514,20.909 125.224,20.909 127.2,22.885 v1(127.2,28)
pads on no net: "DP A.13" "DP A.14" "DP A.19" "DP A.20" "DP A.MH5" "DP B.13" "DP B.14" "DP B.19" "DP B.20" "DP B.MH5" "DP S.MH5" "HDMI A.14" "HDMI A.18" "HDMI B.14" "HDMI B.18" "HDMI S.14" "USB A.4" "USB A.MH1" "USB A.MH2" "USB B.4" "USB B.MH1" "USB B.MH2" IC1.9 IC1.30 IC2.20 IC2.21 IC2.42

## Polygon pours and split planes (outlines as drawn)
GND on GND1 (split plane): 169.49,0.51 0.51,0.51 0.51,45.49 169.49,45.49
GND on GND2 (split plane): 169.49,0.51 0.51,0.51 0.51,45.49 169.49,45.49

## Silkscreen, mask and mechanical layers (free items; w line width, h text height)
Top Overlay:
  text "A" at 99.954,41.354 h1.52
  text "OFF" at 88.254,41.254 h1.52
  text "ON" at 89.054,30.654 h1.52
  text "B" at 99.754,30.554 h1.52

## Text inside footprints (layer, text, board x,y; h text height)
C22: Top Overlay "+" at 73,30.8 h1.22 r270
SW1: Top Component Outline "WE" at 89.4,39.05 h1.02; Top Overlay "WE" at 89.4,39.05 h1.02
SW2: Top Component Outline "WE" at 99.65,39.05 h1.02; Top Overlay "WE" at 99.65,39.05 h1.02
"USB A": Top Component Center "PCB Edge" at 97,-0.1 h0.41
"USB B": Top Component Center "PCB Edge" at 85.8,-0.1 h0.41
"USB S": Top Component Center "PCB Edge" at 70.8,-2.22 h0.81